# Altium PCB bcan_adapter.PcbDoc
Units mm, origin at the board's own origin, x right, y up, seen from the top; angles counter-clockwise.
Board outline 152.4 x 101.6 mm, 2 copper layers (Top Layer, Bottom Layer); 7 components, 6 nets, 34 pads, 4 vias.
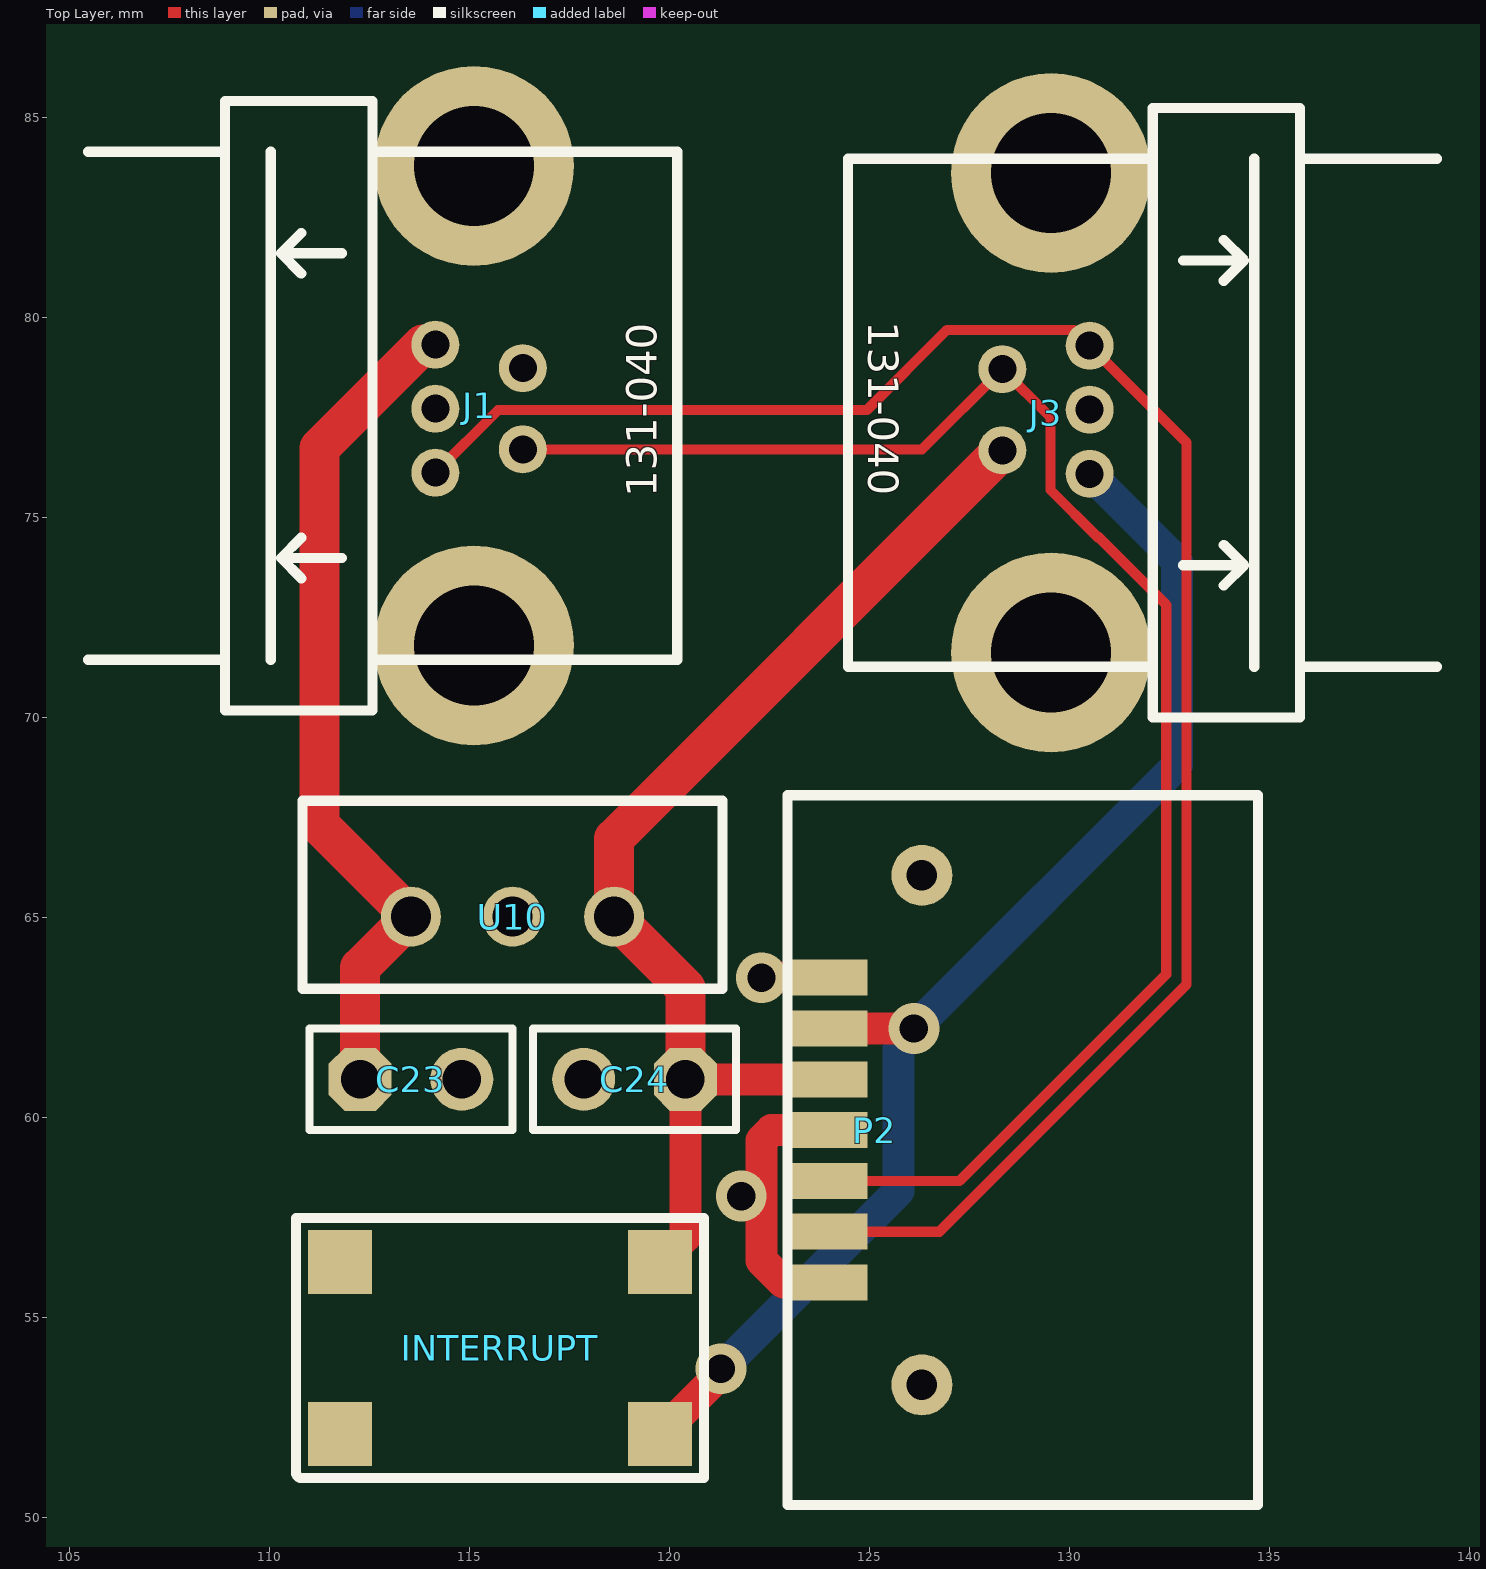
[diagram p0: Top Layer view]
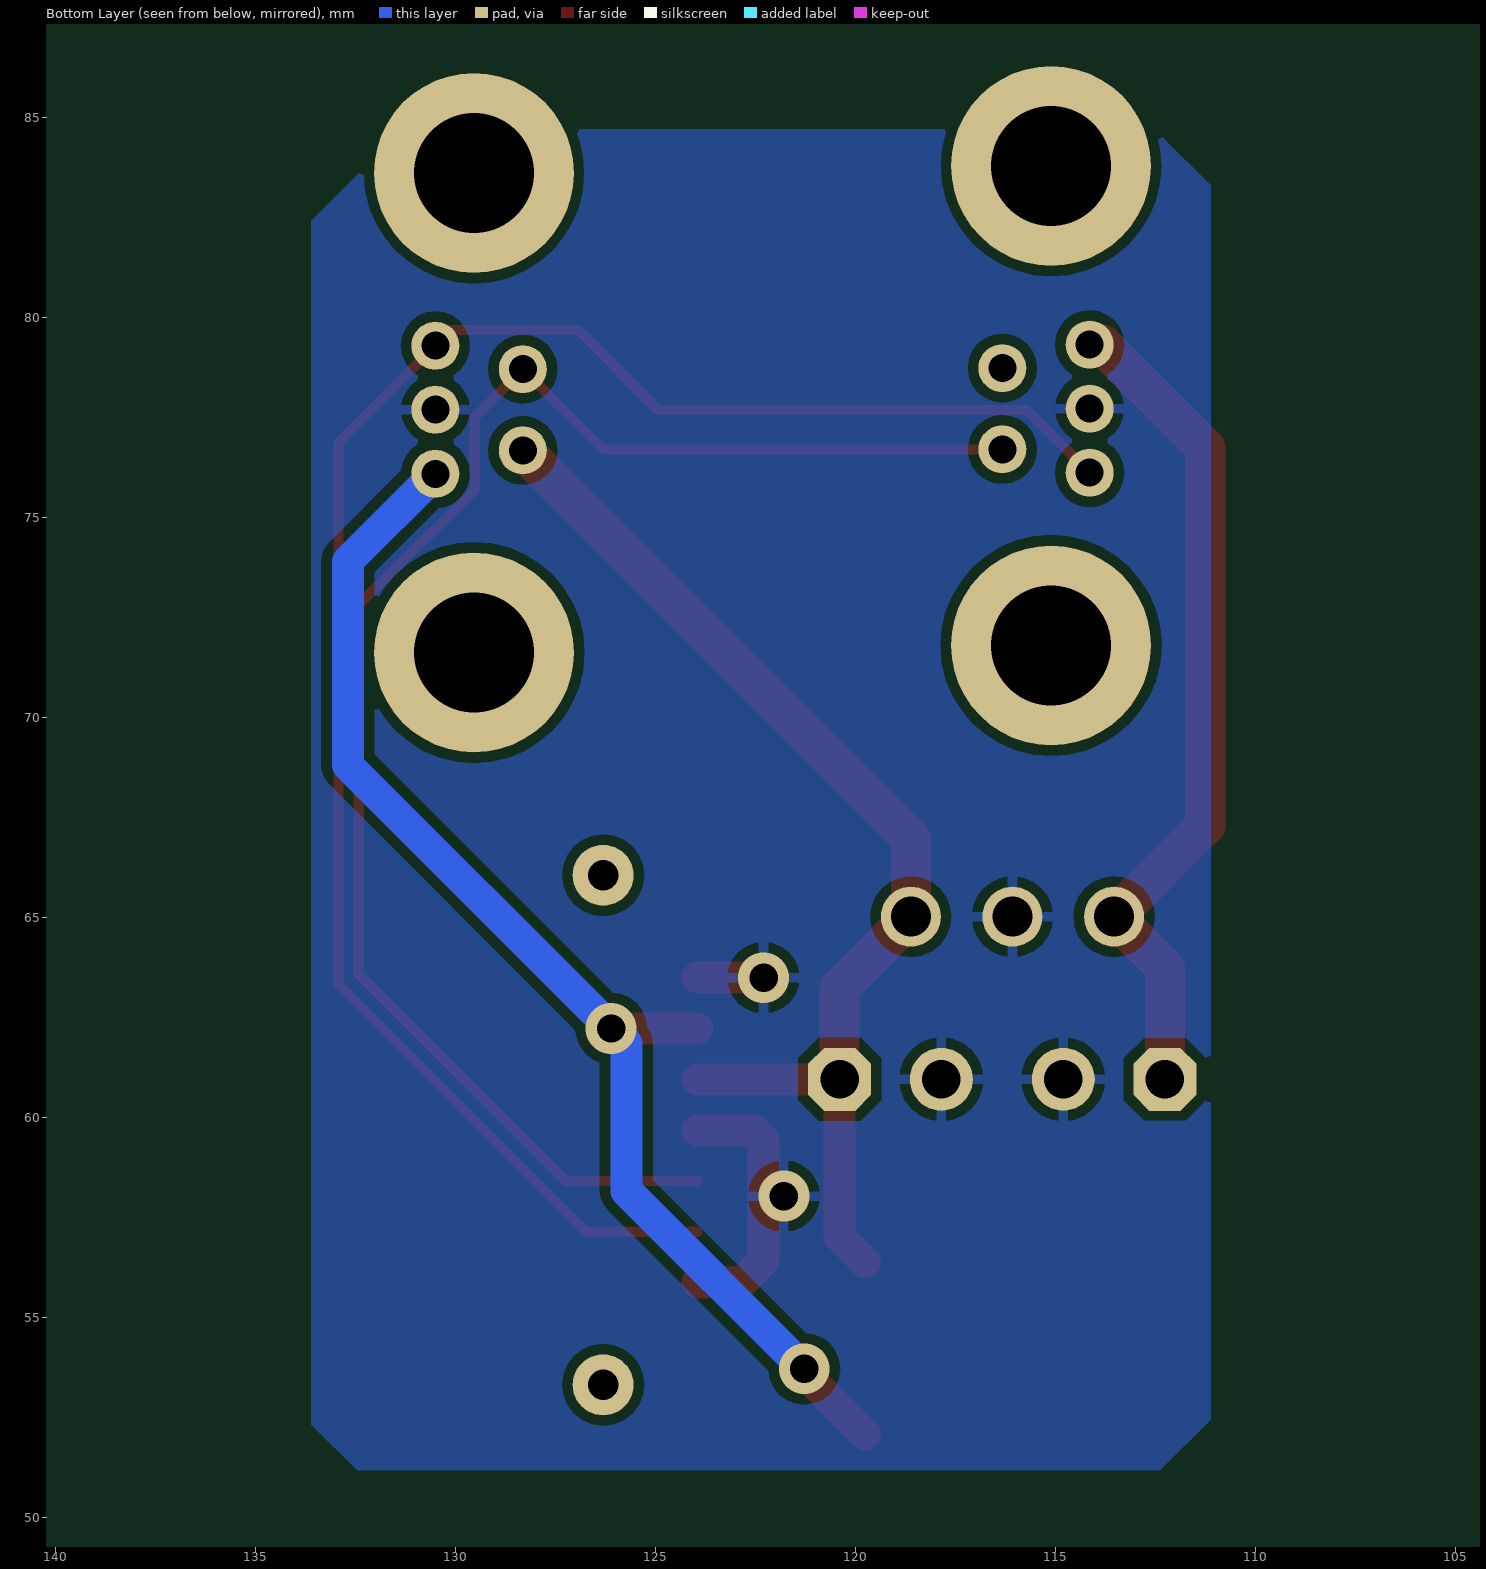
[diagram p1: Bottom Layer view, seen from below]

## Layer stack, top to bottom
Top Layer: signal copper 0.0356
Dielectric: dielectric 0.32, FR-4, Dk 4.8
Bottom Layer: signal copper 0.0356

## Board outline
25.4,25.4 177.8,25.4 177.8,127 25.4,127

## Design rules (kind name [scope] priority, off if disabled: settings)
Clearance [All] p1: gap=0.254
ComponentClearance [All] p1 off: gap=0.254 collisioncheckmode=3 verticalgap=0.254 showdistances=FALSE
MinimumSolderMaskSliver [All] p1 off: minsoldermaskwidth=0.254
PolygonConnect [All] p1: connectstyle=Relief reliefconductorwidth=0.254 reliefentries=4 polygonreliefangle="90 Angle"
RoutingVias [All] p1: holewidth=0.711 width=1.27 viastyle="Through Hole" minholewidth=0.711 minwidth=1.27 maxholewidth=0.711 maxwidth=1.27
SilkToSilkClearance [All] p1 off: silktosilkclearance=0.254
SilkscreenOverComponentPads [All] p1 off: minsilkscreentomaskgap=0.254
SolderMaskExpansion [All] p1: expansion=0.102
TestPointUsage [All] p1: valid=0 allowmultiple=FALSE
Testpoint [All] p1: side=15 testpointundercomponent=TRUE minsize=1.016 maxsize=2.54 preferedsize=1.524 minholesize=0 maxholesize=1.016 preferedholesize=0.813 testpointgrid=0.025 style=1023 order=0-112345678
Width [All] p1: maxlimit=2 minlimit=0.2 preferedwidth=0.254
20 further rules are at their usual default settings.

## Components (designator, comment, footprint, x,y, rotation, side; value= is the part's Value field where it differs from the comment)
C23 "100u" HDR1X2C 112.268,60.96 r0 top
C24 "100u" HDR1X2C 120.396,60.96 r180 top
INTERRUPT "B3FS" smd_switch 20.71,-26.387 r180 top
J1 "CON5-S" TRIAD5F 116.332,78.74 r90 top
J3 "CON5-S" TRIAD5F 128.321,76.683 r270 top
P2 "SATA" 47080-4005-SATA 126.312,53.32 r90 top
U10 "MC78M05CT" TO-220-UP 116.078,65.024 r0 top

## Footprints (in the part's own frame and the unit in brackets; to place one, negate y for a bottom-side part, rotate by r counter-clockwise, add the part's x,y. Pads: shape width x height; smd on the part's side, far side on the other; paste and mask are expansions set on the pad)
47080-4005-SATA [mm]
  round 1.524 hole 0.762: 0(0,0) 0(12.74,0)
  rect 0.9x2 smd: 1(2.56,2.36) 2(3.83,2.36) 3(5.1,2.36) 4(6.37,2.36) 5(7.64,2.36) 6(8.91,2.36) 7(10.18,2.36)
  silkscreen extent -3,-8.4 14.74,3.36
HDR1X2C [mil]
  oct 62x62 hole 38: 1(0,0)
  round 62 hole 38: 2(100,0)
  silkscreen extent -50,-50 150,50
smd_switch [mm]
  rect 1.6x1.6 smd: 1(-99.05,-78.475) 2(-91.05,-78.475) 3(-99.05,-82.775) 4(-91.05,-82.775)
  silkscreen extent -100.15,-83.88 -89.95,-77.38
TO-220-UP [mm]
  round 1.5 hole 1: 1(-2.54,0) 2(0,0) 3(2.54,0)
  silkscreen extent -5.25,-1.8 5.25,2.9
TRIAD5F [mm]
  round 5 hole 3: 0(-6.934,1.219) 0(5.055,1.219)
  round 1.2 hole 0.7: 1(0,0) 2(0.584,2.184) 3(-1.016,2.184) 4(-2.616,2.184) 5(-2.032,0)
  silkscreen extent -8.56,-3.86 6.68,10.87

## Part data
C23 C24: library part CAP-POL, "Capacitor"
INTERRUPT: "SMD tactile switch"
J1 J3: "Connector, 2 pin, with shield @ S"
U10: "3-Terminal Medium-Current Positive Fixed Voltage Regulator"

## Via types
v1: diameter 1.27, hole 0.711, Top Layer to Bottom Layer, 4 vias

## Nets (pads, with @x,y where several pads share a name; then routed paths per layer and width w, separated by ;. In a path a pad name is that pad's centre, name@x,y a point inside that pad or via, vN(x,y) a via of type N, cw(c..) or ccw(c..) an arc to the next point about the centre after c; other vN are vias at no path point)
5V: C24.1 INTERRUPT.3 J3.1 P2.5 U10.3 | length 28.9
  Top Layer w0.8: INTERRUPT.3 120.396,57.024 C24.1 P2.5
  Top Layer w1: C24.1 120.396,63.246 U10.3 118.618,66.98 J3.1
12V: C23.1 J1.2 U10.1 | length 21.2
  Top Layer w1: C23.1 112.268,63.754 U10.1 111.252,67.31 111.252,76.743 113.833,79.324 J1.2
CAN_H: J1.4 J3.4 P2.2 | length 46.5
  Top Layer w0.254: J1.4 115.713,77.689 124.933,77.689 126.94,79.696 130.108,79.696 J3.4 132.929,76.875 132.929,63.333 126.746,57.15 P2.2
CAN_L: J1.5 J3.5 P2.3 | length 40.3
  Top Layer w0.254: J1.5 126.314,76.708 J3.5 129.524,77.511 129.524,75.692 130.707,74.509 130.733,74.509 132.421,72.821 132.421,63.587 127.254,58.42 P2.3
GND: C23.2 C24.2 J1.3 J3.3 P2.1 P2.4 P2.7 U10.2 | length 8.8
  Top Layer w0.8: v1(121.793,58.039) v1@122.298,58.039 ; v1(122.301,63.5) P2.7 ; P2.1 122.847,55.88 122.298,56.429 v1@122.298,58.039 ; P2.4 122.555,59.69 122.298,59.433 v1@122.298,58.039
INT: INTERRUPT.1 J3.2 P2.6 | length 32.4
  Top Layer w0.8: INTERRUPT.1 121.285,53.613 v1(121.285,53.721) ; P2.6 v1(126.111,62.23)
  Bottom Layer w0.8: v1(121.285,53.721) 125.73,58.166 125.73,61.849 v1(126.111,62.23) 132.694,68.813 132.694,73.91 J3.2
pads on no net: INTERRUPT.2 INTERRUPT.4 J1.0 J1.1 J3.0 P2.0

## Polygon pours and split planes (outlines as drawn)
GND on Bottom Layer "GND" (solid): 111.125,83.312 112.522,84.709 131.318,84.709 133.096,82.931 133.604,82.423 133.604,52.451 133.604,52.324 132.461,51.181 113.284,51.181 112.395,51.181 111.125,52.451

## Silkscreen, mask and mechanical layers (free items; w line width, h text height)
Mechanical 1:
  lines w0.254: 134.747,86.487 109.982,86.487 109.982,50.292 134.747,50.292 134.747,86.614

## Text inside footprints (layer, text, board x,y; h text height)
J1: Top Overlay "131-040" at 119.685,75.514 h0.76 r90
J3: Top Overlay "131-040" at 124.968,79.908 h0.76 r270